# EAGLE board open-lux-F (EAGLE 6.5.0)
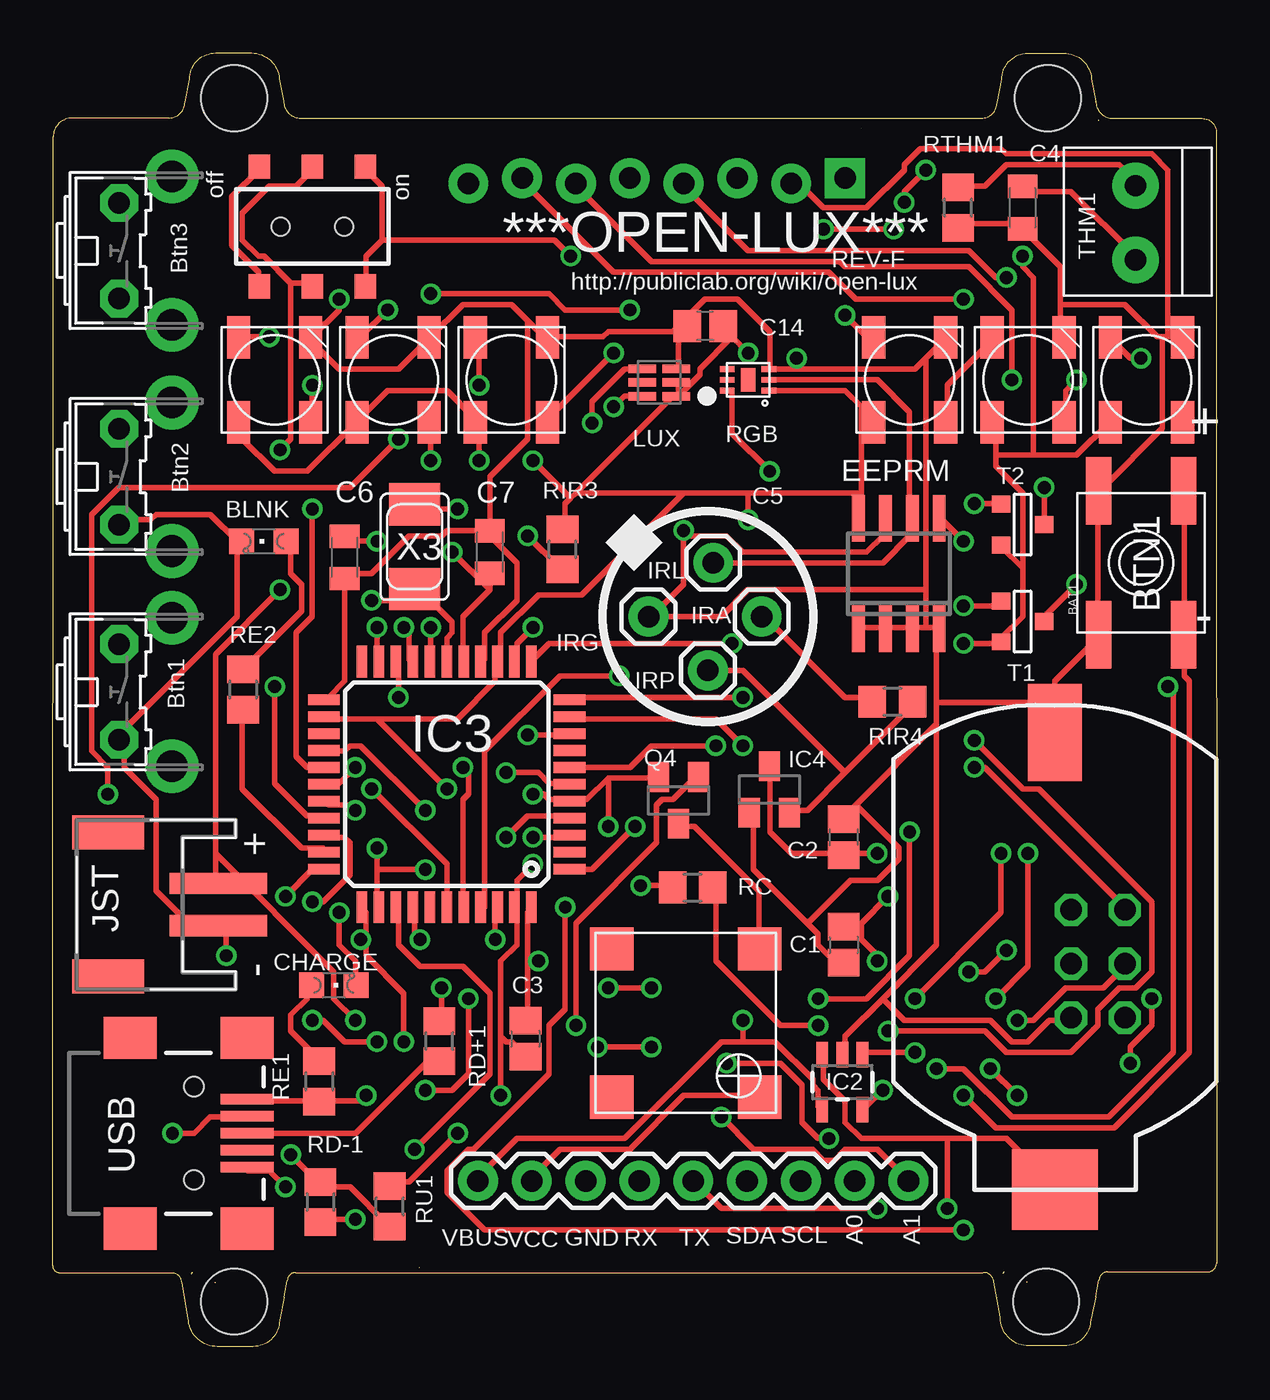
[diagram p0: board, top side]
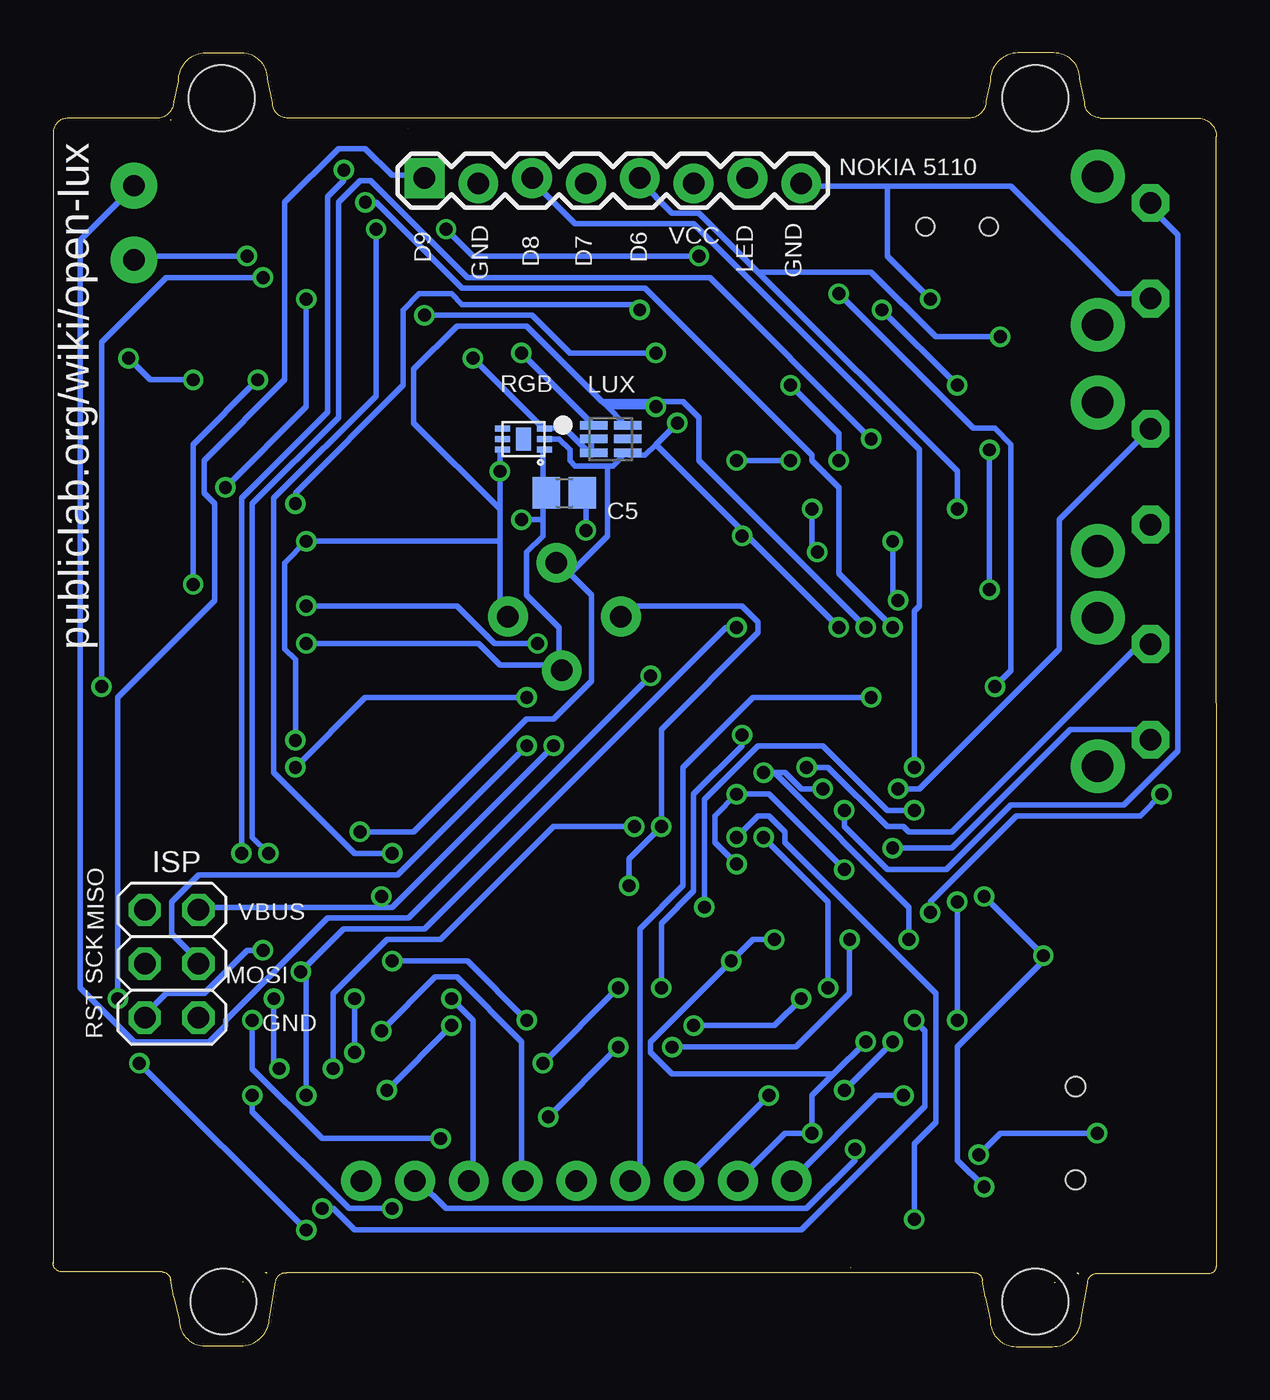
[diagram p1: board, bottom side, seen from below]

Size 54.93 x 61.06 mm. Coordinates in mm from the lower left corner, seen from the top.
Outline: 54.92,57.31 54.93,3.93
Outline: 7.63,3.03 arc-90 7.65,3.01
Outline: 17.28,3.73 arc-90 17.29,3.72
Outline: 38.17,57.5 arc-90 38.16,57.51
Outline: 49.35,57.89 arc90 49.37,57.91
Outline: 43.89,3.49 11.45,3.49 arc90 11.06,3.1
Outline: 43.84,57.98 11.7,57.98 arc-90 10.89,58.79 10.89,58.78 10.69,59.73 arc90 9.38,61.06 7.68,61.06 arc90 6.45,59.82 6.23,58.73 arc-90 5.49,57.99 0.9,57.99 arc90 0.01,57.1 0.01,56.91 0,3.82 arc90 0.36,3.46 5.59,3.46 arc-90 6.09,3.02 6.39,1.34 arc90 7.76,0 9.46,0 arc90 10.69,1.24 10.91,2.33 11.06,3.11
Outline: 43.83,57.98 arc90 44.57,58.72 44.79,59.81 arc-90 46.02,61.05 47.72,61.05 arc-90 49.03,59.72 49.23,58.77 49.23,58.78 arc90 50.04,57.97 54.26,57.97 arc-90 54.92,57.31
Outline: 6.25,2.28 6.25,2.27
Outline: 6.59,3.48 arc90 6.53,3.42
Outline: 45.95,3.06 arc-90 45.97,3.04
Outline: 44.57,2.31 44.57,2.3
Outline: 49.38,3.14 49.23,2.36 48.98,1.27 arc-90 47.75,0.03 46.08,0.03 arc-90 44.71,1.37 44.41,3.05 arc90 43.91,3.49
Outline: 49.38,3.13 arc-90 49.77,3.52 54.49,3.52 arc90 54.93,3.96
Outline: 44.91,3.51 arc90 44.85,3.45
Copper layers (1*16): Top 0.0356mm / dielectric 1.5011mm / Bottom 0.0356mm
Design rules "LaenPCBOrder": minimum track width 6mil, minimum drill 13mil, track to track 6mil, track to pad 6mil, pad to pad 6mil, via to via 6mil, smd to smd 6mil, copper to edge 15mil, drill to drill 6mil, minimum pad ring 7mil, minimum via ring 7mil, stop-mask expansion 3mil, vias tented up to drill 0mil, thermal gap 10mil
Net classes: 0 default: width 0.254 mm, clearance 0.203 mm; 1 power: width 0.254 mm, clearance 0.203 mm
Holes 3.1 mm at 8.56,58.92 46.96,58.92 8.56,2.12 46.88,2.12

## Footprints (pad centres in the part's own frame; a part is rotated, then mirrored left to right if it is on the bottom)
B3F-31XX = drill 1.016 pad 1.778 octagon: 1 -2.261,-1.245; 2 2.261,-1.245 | drill 1.499 pad 2.54: 3 -3.505,1.245; 4 3.505,1.245
BATTCOM_20MM_PTH_SMT = smd 4.572 x 2.54: P$1 0,0 | smd 3.81 x 4.064: P$2 21.59,0
CHIPLED_0805 = smd 1.2 x 1.2: A 0,-1.05; C 0,1.05
EVQ-Q2 = smd 3.2 x 1.2: A -3.4,-2; A' 3.4,-2; B -3.4,2; B' 3.4,2
C0805 = smd 1.3 x 1.5: 1 -0.85,0; 2 0.85,0
C0805K = smd 1.1 x 1.4: 1 -1,0; 2 1,0
JST-PH-2-SMT-RA = smd 1 x 4.6: 1 1,-3.7; 2 -1,-3.7 | smd 1.6 x 3.4: NC1 -3.4,1.5; NC2 3.4,1.5
SO-08 = smd 0.6 x 2.2: 1 -1.905,-2.6; 2 -0.635,-2.6; 3 0.635,-2.6; 4 1.905,-2.6; 5 1.905,2.6; 6 0.635,2.6; 7 -0.635,2.6; 8 -1.905,2.6
SOT23-5 = smd 0.55 x 1.2: 1 -0.95,-1.3; 2 0,-1.3; 3 0.95,-1.3; 4 0.95,1.3; 5 -0.95,1.3
TQFP44 = smd 1.5 x 0.5: 1 -5.8,4; 2 -5.8,3.2; 3 -5.8,2.4; 4 -5.8,1.6; 5 -5.8,0.8; 6 -5.8,0; 7 -5.8,-0.8; 8 -5.8,-1.6; 9 -5.8,-2.4; 10 -5.8,-3.2; 11 -5.8,-4; 23 5.8,-4; 24 5.8,-3.2; 25 5.8,-2.4; 26 5.8,-1.6; 27 5.8,-0.8; 28 5.8,0; 29 5.8,0.8; 30 5.8,1.6; 31 5.8,2.4; 32 5.8,3.2; 33 5.8,4 | smd 0.5 x 1.5: 12 -4,-5.8; 13 -3.2,-5.8; 14 -2.4,-5.8; 15 -1.6,-5.8; 16 -0.8,-5.8; 17 0,-5.8; 18 0.8,-5.8; 19 1.6,-5.8; 20 2.4,-5.8; 21 3.2,-5.8; 22 4,-5.8; 34 4,5.8; 35 3.2,5.8; 36 2.4,5.8; 37 1.6,5.8; 38 0.8,5.8; 39 0,5.8; 40 -0.8,5.8; 41 -1.6,5.8; 42 -2.4,5.8; 43 -3.2,5.8; 44 -4,5.8
SOT23 = smd 1 x 1.4: 1 -0.95,-1.1; 2 0.95,-1.1; 3 0,1.1
1X01 = drill 1.016 pad 1.88: 1 0,0
2X03 = drill 1.016 octagon: 1 -2.54,-1.27; 2 -2.54,1.27; 3 0,-1.27; 4 0,1.27; 5 2.54,-1.27; 6 2.54,1.27
AYZ0202 = smd 1 x 1.15: 1 -2.5,2.825; 2 0,2.825; 3 2.5,2.825; 4 -2.5,-2.825; 5 0,-2.825; 6 2.5,-2.825 | hole 0.85: 1.5,0; -1.5,0
1X09 = drill 1.016 pad 1.88: 1 0,0; 2 2.54,0; 3 5.08,0; 4 7.62,0; 5 10.16,0; 6 12.7,0; 7 15.24,0; 8 17.78,0; 9 20.32,0
TSL2561_FN@1 = smd 1.3 x 0.4: ADR -0.8,0; CLK 0.8,-0.65; DATA 0.8,0.65; INT 0.8,0; VDD -0.8,0.65; VSS -0.8,-0.65
DFN-6 = smd 0.28 x 0.7: 1 -0.5,-0.988; 2 0,-0.988; 3 0.5,-0.988; 4 0.5,0.988; 5 0,0.988; 6 -0.5,0.988 | smd 1.1 x 0.7: P$1 0,0
1X08_LOCK = drill 1.016 pad 1.88 square: 1 0,0.127 | drill 1.016 pad 1.88: 2 2.54,-0.127; 3 5.08,0.127; 4 7.62,-0.127; 5 10.16,0.127; 6 12.7,-0.127; 7 15.24,0.127; 8 17.78,-0.127
R0805 = smd 1.3 x 1.5: 1 -0.95,0; 2 0.95,0
R0805@1 = smd 1.3 x 1.5: 1 -0.95,0; 2 0.95,0
SOT-23 = smd 0.787 x 0.889: 1 0.025,-1.016; 2 -0.94,1.016; 3 0.991,1.016
1X2-3.5MM = drill 1 pad 2.184: 1 1.8,0; 2 -1.7,0
SMT-8585-BUZZER = smd 2.05 x 2.05: + -3.5,-3.5; - 3.5,-3.5; NC1 -3.5,3.5; NC2 3.5,3.5
RGBLED5050_4 = smd 2 x 1.1: D -2,1.7; I 2,1.7; O -2,-1.7; S 2,-1.7
USB-MINIB = smd 2.5 x 0.5: D+ 2.5,0; D- 2.5,0.8; GND 2.5,-1.6; ID 2.5,-0.8; VBUS 2.5,1.6 | smd 2.5 x 2: GND@1 -3,-4.5; GND@2 -3,4.5; GND@3 2.5,4.5; GND@4 2.5,-4.5 | hole 0.9: 0,2.2; 0,-2.2
NX5032 = smd 2 x 2.4: P$1 2,0; P$2 -2,0

## Placement (x,y rotation side)
B1  [B3F-31XX]  4.37,30.9 270 top
B2  [B3F-31XX]  4.37,41.06 270 top
B3  [B3F-31XX]  4.37,51.73 270 top
BAT1  LIR2032  [BATTCOM_20MM_PTH_SMT]  47.3,28.99 270 top
BLNK  0805  [CHIPLED_0805]  9.96,38.01 90 top
BTN1  [EVQ-Q2]  51.36,36.99 270 top
C1  10u  [C0805]  37.33,18.96 270 top
C2  10u  [C0805]  37.33,24.04 90 top
C3  10u  [C0805]  22.3,14.53 270 top
C4  [C0805K]  45.77,53.76 270 top
C5  0.1uF  [C0805]  30.79,40.3 0 bottom
C6  18pF  [C0805K]  13.77,37.25 270 top
C7  18pF  [C0805K]  20.63,37.5 90 top
C14  0.1uF  [C0805]  30.79,48.17 180 top
CHARGE  0805  [CHIPLED_0805]  13.26,17.05 270 top
CN1  [JST-PH-2-SMT-RA]  4.12,20.86 90 top
EEPRM  24AA128SN  [SO-08]  39.93,36.49 0 top
IC2  MCP73831  [SOT23-5]  37.26,12.48 180 top
IC3  ATMEGA32U4-AU  [TQFP44]  18.59,26.53 180 top
IC4  MCP1700-33  [SOT23]  33.82,26.29 0 top
IRA  M01PTH  [1X01]  33.45,34.45 0 top
IRG  M01PTH  [1X01]  28.12,34.45 0 top
IRL  M01PTH  [1X01]  31.17,36.99 0 top
IRP  M01PTH  [1X01]  30.91,31.91 0 top
ISP  [2X03]  49.33,18.07 270 bottom
J1  AYZ0202  [AYZ0202]  12.24,52.87 180 top
JP1  M09  [1X09]  20.06,7.82 0 top
LUXNIR  TSL2561  [TSL2561_FN@1]  28.63,45.5 180 top
LUXNIR1  TSL2561  [TSL2561_FN@1]  28.6,42.84 0 bottom
LUXRGB1  TCS34725  [DFN-6]  32.82,45.63 90 top
LUXRGB2  TCS34725  [DFN-6]  32.72,42.84 90 bottom
NKA  [1X08_LOCK]  37.39,55.03 0 bottom
Q4  BSS123  [SOT23]  29.53,25.78 180 top
RC  22K  [R0805]  30.2,21.67 0 top
RD+1  47  [R0805]  18.24,14.42 90 top
RD-1  47  [R0805]  12.62,6.82 270 top
RE1  1.5K  [R0805]  12.57,12.52 270 top
RE2  1.5K  [R0805]  8.98,31.01 270 top
RIR3  10K  [R0805]  24.05,37.63 90 top
RIR4  10K  [R0805]  39.62,30.44 0 top
RTHM1  3k  [R0805@1]  42.72,53.76 90 top
RU1  1.5K  [R0805]  15.89,6.61 90 top
T1  FDN340P  [SOT-23]  45.77,34.2 90 top
T2  FDN340P  [SOT-23]  45.77,38.77 90 top
THM1  1X2-3.5MM  [1X2-3.5MM]  51.11,53 90 top
U$1  BUZZER  [SMT-8585-BUZZER]  29.87,15.27 90 top
U$6  WS2813  [RGBLED5050_4]  10.47,45.63 90 top
U$7  WS2813  [RGBLED5050_4]  16.05,45.63 90 top
U$8  WS2813  [RGBLED5050_4]  21.64,45.63 90 top
U$9  WS2813  [RGBLED5050_4]  40.44,45.63 90 top
U$10  WS2813  [RGBLED5050_4]  46.03,45.63 90 top
U$11  WS2813  [RGBLED5050_4]  51.61,45.63 90 top
X2  USBSMD  [USB-MINIB]  6.66,10.07 0 top
X3  8MHz  [NX5032]  17.07,37.76 90 top

## Library data of the parts
B1-B3 BTN1 C5-C7 C14 CN1 IC4 THM1 U$1 U$6-U$11 = adafruit
BAT1 IC2 J1 = SparkFunNew
BLNK CHARGE = led
C1-C3 = resistor
C4 = adafruit2013
EEPRM = microchip; MF: MICROCHIP; MPN: 24AA128-I/SN; OC_FARNELL: unknown; OC_NEWARK: 92C6842
IC3 X3 = adaprog
IRA IRG IRL IRP JP1 NKA = SparkFun-Connectors
ISP = pinhead
LUXNIR LUXNIR1 = microbuilder
LUXRGB1 LUXRGB2 = dwbLibrary
Q4 = transistor-small-signal
RC RD+1 RD-1 RE1 RE2 RIR3 RIR4 RTHM1 RU1 = rcl
T1 T2 = zetex
X2 = SparkFun

## Nets
A0: IC3.36 JP1.8
A1: IC3.37 JP1.9
A2: IC3.38
A3: B2.1 IC3.39
A4: B1.1 IC3.40
A5: IC3.41 RTHM1.2 THM1.1
D4: IC3.25
D5: IC3.31 Q4.1
D6: IC3.27 NKA.5 U$6.I
D7: IC3.1 NKA.4
D8: IC3.28 NKA.3
D9: IC3.29 NKA.1
D10: IC3.30 T2.3
D11: IC3.12 T1.3
D12: B3.1 IC3.26
D13: IC3.32 RE2.2
D+: RD+1.1 X2.D+
D-: RD-1.1 RU1.1 X2.D-
GND: B1.2 B2.2 B3.2 BAT1.P$1 BLNK.C BTN1.A BTN1.A' C1.2 C2.2 C3.2 C4.2 C5.2 C6.2 C7.2 C14.2 CN1.2 EEPRM.1 EEPRM.2 EEPRM.3 EEPRM.4 EEPRM.7 IC2.2 IC3.5 IC3.15 IC3.23 IC3.33 IC3.35 IC3.43 IC4.1 IRG.1 ISP.6 JP1.3 LUXNIR1.ADR LUXNIR1.VSS LUXNIR.VSS LUXRGB1.3 LUXRGB2.3 NKA.2 NKA.8 Q4.2 RC.1 RTHM1.1 U$6.S U$7.S U$8.S U$9.S U$10.S U$11.S X2.GND
MISO: IC3.11 ISP.1
MOSI: IC3.10 ISP.4
N$1: J1.3 J1.6
N$2: C7.1 IC3.16 X3.P$1
N$3: C6.1 IC3.17 X3.P$2
N$4: NKA.7 T2.1
N$5: CHARGE.C IC2.1
N$6: IC2.5 RC.2
N$7: Q4.3 U$1.-
N$8: NKA.6 T1.1
N$10: CHARGE.A RE1.1
N$18: BLNK.A RE2.1
N$21: IC3.4 RD+1.2
N$22: IC3.3 RD-1.2
N$23: U$6.O U$7.I
N$24: U$7.O U$8.I
N$25: U$8.O U$9.I
N$26: U$9.O U$10.I
N$28: U$10.O U$11.I
RESET: BTN1.B BTN1.B' IC3.13 ISP.5
RXD: IC3.20 JP1.4
RXLED/SS: IC3.8
SCK: IC3.9 ISP.3
SCL: EEPRM.6 IC3.18 IRL.1 JP1.7 LUXNIR1.CLK LUXNIR.CLK LUXRGB1.2 LUXRGB2.2 RIR3.1
SDA: EEPRM.5 IC3.19 IRA.1 JP1.6 LUXNIR1.DATA LUXNIR.DATA LUXRGB1.6 LUXRGB2.6 RIR4.1
TXD: IC3.21 JP1.5
TXLED: IC3.22
VBAT: BAT1.P$2 CN1.1 IC2.3 J1.2 J1.5
VBUS: C1.1 IC2.4 IC3.7 ISP.2 JP1.1 RE1.2 X2.VBUS
VCC: C3.1 C4.1 C5.1 C14.1 EEPRM.8 IC3.6 IC3.14 IC3.24 IC3.34 IC3.42 IC3.44 IC4.2 IRP.1 JP1.2 LUXNIR1.VDD LUXNIR.ADR LUXNIR.VDD LUXRGB1.1 LUXRGB2.1 RIR3.2 RIR4.2 RU1.2 T1.2 T2.2 THM1.2 U$1.+ U$6.D U$7.D U$8.D U$9.D U$10.D U$11.D
VDD: C2.1 IC4.3 J1.1 J1.4

## Tracks (layer width: path | path; a pad name or v marks a point on that pad's centre or on a via)
A0  (via drill 0.61)
  Top 0.254: v17.07,9.31 20.63,12.86 20.63,16.67 19.36,17.94 17.32,17.94 16.31,18.96 16.31,20.48 IC3.36
  Bottom 0.254: v17.07,9.31 17.07,8.8 19.36,6.51 36.37,6.51 37.64,7.78 JP1.8
A1  (via drill 0.61)
  Top 0.254: v17.32,19.21 17.07,19.47 17.07,20.48 IC3.37 | v28.25,14.13 v25.71,14.13 | v31.55,10.83 33.07,9.31 35.87,9.31 36.37,8.8 36.88,8.8 37.39,9.31 38.91,9.31 40.18,8.04 JP1.9
  Bottom 0.254: v17.32,19.21 17.32,16.67 19.86,14.13 v25.71,14.13 | v31.55,10.83 v28.25,14.13
A3  (via drill 0.61)
  Top 0.254: v15.04,26.33 18.59,22.77 IC3.39
  Bottom 0.254: v15.04,26.33 14.02,26.33 7.42,32.93 7.42,39.03 B2.1
A4  (via drill 0.61)
  Top 0.254: v19.36,27.34 19.61,27.09 19.61,26.07 19.36,25.82 19.36,20.74 IC3.40
  Bottom 0.254: v19.36,27.34 18.34,27.34 15.55,24.55 14.78,24.55 14.53,24.29 12.5,24.29 3.86,32.93 3.35,32.93 B1.1
A5  (via drill 0.61)
  Top 0.254: v26.72,31.66 23.93,31.66 20.37,28.1 20.37,20.74 IC3.41 | RTHM1.2 42.72,54.77 43.99,54.77 45.01,55.79 50.34,55.79 51.11,55.03 THM1.1
  Bottom 0.254: v26.72,31.66 38.15,20.23 41.96,20.23 46.79,15.4 46.79,15.15 47.55,14.39 51.11,14.39 53.65,16.93 53.65,52.23 51.11,54.77 THM1.1
D5  (via drill 0.61)
  Top 0.254: v24.69,15.15 24.69,19.98 28.5,23.79 28.5,25.56 28.75,25.82 29.26,25.82 30.28,26.83 Q4.1 | v19.61,16.42 19.61,12.86 18.85,12.1 v17.58,12.1 | v15.29,14.39 13.77,14.39 12.75,15.4 v12.24,15.4 | v12.24,20.99 12.75,20.99 14.02,22.26 14.02,23.79 13.77,24.04 13.01,24.04 IC3.31
  Bottom 0.254: v24.69,15.15 20.88,15.15 v19.61,16.42 | v15.29,14.39 v17.58,12.1 | v12.24,20.99 v12.24,15.4
D6  (via drill 0.61)
  Top 0.254: v12.24,39.53 12.24,34.45 11.48,33.69 11.48,27.85 11.99,27.34 12.75,27.34 IC3.27 | v10.21,47.66 8.94,47.66 U$6.I
  Bottom 0.254: v12.24,39.53 12.24,41.31 21.64,50.71 | 21.64,50.71 24.44,53.5 25.71,53.5 27.23,55.03 NKA.5 | v10.21,47.66 13.26,47.66 16.31,50.71 21.64,50.71
D7  (via drill 0.61)
  Top 0.254: v27.48,24.55 25.45,22.52 24.44,22.52 IC3.1 | v41.71,13.12 42.98,13.12 45.26,10.83 49.84,10.83 52.88,13.88 52.88,30.9 v52.63,31.15 | v45.01,50.46 44.5,50.46 43.23,51.73 32.82,51.73 29.77,54.77 NKA.4
  Bottom 0.254: v27.48,24.55 31.29,24.55 36.63,19.21 39.17,19.21 41.71,16.67 v41.71,13.12 | v52.63,31.15 52.63,47.41 49.58,50.46 v45.01,50.46
D8  (via drill 0.61)
  Top 0.254: v14.28,27.34 13.51,26.58 13.01,26.58 IC3.28
  Bottom 0.254: v14.28,27.34 14.28,34.71 14.02,34.96 14.02,42.33 24.69,53 30.28,53 32.31,55.03 NKA.3
D9  (via drill 0.61)
  Top 0.254: v14.28,25.31 14.02,25.56 13.01,25.56 IC3.29 | v24.18,20.74 24.18,15.91 23.42,15.15 23.42,12.86 19.86,9.31 19.61,9.31 18.59,8.29 18.59,7.28 20.37,5.5 v42.98,5.5 | v50.85,13.37 50.85,14.13 51.87,15.15 v51.87,16.42
  Bottom 0.254: v14.28,25.31 15.55,25.31 18.59,28.36 21.64,28.36 24.18,25.82 v24.18,20.74 | v50.85,13.37 v42.98,5.5 | v51.87,16.42 51.87,30.64 47.3,35.22 47.3,39.79 47.8,40.3 47.8,41.82 43.99,45.63 43.99,54.01 41.45,56.55 40.18,56.55 38.91,55.28 37.39,55.28 NKA.1
D10  (via drill 0.61)
  Top 0.254: v43.49,39.79 44.76,39.79 T2.3 | v27.23,48.93 24.18,48.93 23.42,49.69 v17.83,49.69 | v10.47,31.15 10.47,26.58 11.99,25.06 12.75,25.06 IC3.30
  Bottom 0.254: v43.49,39.79 43.49,40.3 38.41,45.38 38.41,48.93 37.64,49.69 36.12,49.69 35.61,49.19 27.48,49.19 v27.23,48.93 | v17.83,49.69 11.48,43.34 10.47,43.34 9.7,42.58 9.7,31.91 v10.47,31.15
D11  (via drill 0.61)
  Top 0.254: v42.98,34.96 44.76,34.96 T1.3 | v32.06,33.18 23.42,33.18 22.66,32.42 IC3.12
  Bottom 0.254: v42.98,34.96 35.87,34.96 34.09,33.18 v32.06,33.18
D12  (via drill 0.61)
  Top 0.254: v17.58,25.31 14.53,28.36 14.02,28.36 13.77,28.1 13.01,28.1 IC3.26
  Bottom 0.254: v17.58,25.31 17.58,24.55 15.55,22.52 12.75,22.52 9.7,25.56 4.37,25.56 1.83,28.1 1.83,52.49 3.1,53.76 B3.1
D13
  Top 0.254: IC3.32 12.75,23.53 11.74,23.53 8.94,26.33 8.94,29.88 RE2.2
D+
  Top 0.254: X2.D+ 14.28,10.07 17.58,13.37 18.09,13.37 RD+1.1
D-  (via drill 0.61)
  Top 0.254: RU1.1 15.8,5.75 14.02,7.53 12.75,7.53 RD-1.1 12.5,7.78 v11.23,9.05 | v5.64,10.07 6.66,10.07 7.42,10.83 8.94,10.83 X2.D-
  Bottom 0.254: v5.64,10.07 10.21,10.07 v11.23,9.05
GND  (via drill 0.61)
  Top 0.254: v10.97,21.25 12.24,22.52 12.75,22.52 IC3.33 | v8.18,18.45 8.18,19.47 7.93,19.72 CN1.2 7.67,19.98 6.4,19.98 4.88,21.5 4.88,25.82 3.35,27.34 3.35,28.61 B1.2 3.1,28.87 8.69,34.45 8.69,38.01 | v10.97,7.53 10.21,8.29 9.2,8.29 X2.GND | v15.29,23.53 15.29,22.52 | 15.29,22.52 15.29,20.74 IC3.35 | 8.69,38.01 7.42,39.28 4.88,39.28 4.62,39.03 3.35,39.03 B2.2 | 8.69,38.01 BLNK.C | 21.13,14.64 21.39,14.39 21.64,14.39 22.15,13.88 C3.2 | 21.13,14.64 21.13,18.2 21.9,18.96 21.9,20.48 IC3.43 21.9,20.74 21.9,22.01 v22.66,22.77 | 21.13,14.64 v21.13,11.85 | 26.21,26.83 28.5,26.83 Q4.2 | 26.21,26.83 25.2,25.82 24.44,25.82 IC3.5 24.18,25.82 23.42,25.82 23.17,26.07 v22.66,26.07 | v27.74,21.75 29.01,21.75 RC.1 | 26.21,26.83 v26.21,24.55 | 29.77,38.26 29.77,35.98 28.25,34.45 | 29.77,38.26 31.8,38.26 32.56,37.5 38.41,37.5 39.17,38.26 39.17,39.03 EEPRM.7 | 29.77,38.26 v29.77,38.52 | v17.58,22.52 15.29,22.52 | RTHM1.1 42.72,53 45.77,53 C4.2 45.77,52.74 47.55,50.96 47.55,49.19 | 47.55,49.19 47.55,47.66 U$10.S | 52.38,47.66 52.12,47.66 50.6,49.19 47.55,49.19 | 52.38,47.66 52.63,47.66 | 52.63,47.66 53.14,47.66 U$11.S | 52.63,47.66 52.63,55.54 51.87,56.3 45.01,56.3 44.76,56.55 40.95,56.55 40.18,55.79 40.18,55.54 38.41,53.76 36.37,53.76 35.36,54.77 34.85,54.77 NKA.2 | 47.3,30.39 47.3,31.41 49.33,33.44 BTN1.A' 49.33,33.69 49.33,40.3 BTN1.A 49.58,40.55 52.38,43.34 52.38,47.66 | 47.3,30.39 BAT1.P$1 47.3,29.12 | 35.61,19.98 36.12,19.47 36.12,18.96 37.14,17.94 C1.2 | 35.61,19.98 33.07,22.52 33.07,25.06 IC4.1 | EEPRM.1 38.15,33.95 39.17,33.95 EEPRM.2 39.42,33.95 40.44,33.95 EEPRM.3 40.69,33.95 41.2,33.95
  Top 0.254: 39.17,16.42 41.71,18.96 41.71,29.37 | 39.17,16.42 37.39,14.64 37.39,13.88 IC2.2 | 41.71,30.39 41.71,33.69 EEPRM.4 | 41.71,30.39 41.71,29.37 | 41.71,29.37 37.9,25.56 | 37.9,25.56 37.39,25.06 C2.2 | 41.2,33.95 41.71,33.95 EEPRM.4 | 41.96,33.95 EEPRM.4 | 39.17,16.42 40.18,15.4 44.25,15.4 45.26,14.39 46.03,14.39 47.04,15.4 48.06,15.4 ISP.6 | 35.61,19.98 37.64,22.01 38.91,22.01 39.93,23.02 39.93,23.53 37.9,25.56 | 41.71,30.39 47.3,30.39 | 35.1,46.14 40.69,46.14 41.2,46.65 | 35.1,46.14 33.83,46.14 | 41.2,46.65 41.96,47.41 U$9.S | 35.1,46.14 v35.1,46.65 | IC3.23 13.01,30.64 13.77,31.41 C6.2 13.77,36.49 15.04,36.49 16.82,38.26 18.34,38.26 18.59,38.52 20.63,38.52 | IC3.15 20.37,32.42 20.37,33.69 21.9,35.22 21.9,36.99 20.63,38.26 C7.2 20.63,38.52 | 29.52,47.92 29.52,46.14 LUXNIR.VSS | 29.52,47.92 29.77,48.17 C14.2 29.52,47.92 | 29.52,47.92 29.26,47.92 | 29.26,47.92 26.21,47.92 25.96,47.66 23.42,47.66 U$8.S 23.17,47.66 22.4,48.42 | 22.4,48.42 21.64,49.19 19.36,49.19 17.83,47.66 U$7.S 17.58,47.41 16.31,46.14 13.51,46.14 12.24,47.41 U$6.S 12.24,47.66 13.51,48.93 v13.51,49.44 | 20.63,38.52 20.63,41.06 22.4,42.84 22.4,48.42 | 33.83,46.14 33.83,47.92 32.31,49.44 30.79,49.44 29.26,47.92 | 33.83,46.14 LUXRGB1.3 | 41.2,46.65 41.2,35.72 | 41.2,35.72 41.2,33.95 | 28.25,34.45 31.55,34.45 32.82,35.72 41.2,35.72 | 28.25,34.45 IRG.1
  Bottom 0.254: v10.97,21.25 v8.18,18.45 8.18,18.2 12.24,14.13 12.24,8.8 v10.97,7.53 | v15.29,23.53 12.5,23.53 6.91,29.12 3.61,29.12 B1.2 | v21.13,11.85 24.94,8.04 JP1.3 | v27.74,21.75 27.74,23.02 v26.21,24.55 26.21,29.12 21.64,33.69 21.64,34.2 22.4,34.96 27.48,34.96 27.99,34.45 IRG.1 | v29.77,38.52 29.77,40.3 C5.2 | v22.66,22.77 23.67,23.79 23.67,25.06 v22.66,26.07 21.13,26.07 v17.58,22.52 | 15.55,54.77 19.61,54.77 NKA.8 | 15.55,54.77 9.7,54.77 4.62,49.69 3.35,49.69 B3.2 | LUXNIR1.ADR 29.52,42.84 29.52,42.33 LUXNIR1.VSS 29.52,42.07 30.79,43.34 31.55,43.34 LUXRGB2.3 31.8,43.34 v35.1,46.65 | 15.55,54.77 15.55,51.47 v13.51,49.44
MISO  (via drill 0.61)
  Top 0.254: v32.56,30.64 24.44,30.64 IC3.11 | v43.49,27.34 43.99,27.34 50.6,20.74 ISP.1
  Bottom 0.254: v32.56,30.64 40.18,30.64 v43.49,27.34
MOSI  (via drill 0.61)
  Top 0.254: v32.56,28.36 31.29,29.63 24.44,29.63 IC3.10
  Bottom 0.254: v32.56,28.36 38.66,22.26 48.06,22.26 49.33,20.99 49.33,19.47 48.06,18.2 ISP.4
N$1
  Top 0.254: J1.3 9.7,50.2 9.7,50.71 8.43,51.98 8.43,54.27 9.7,55.54 J1.6
N$2  (via drill 0.61)
  Top 0.254: 20.63,35.72 C7.1 | 20.63,35.72 19.36,34.45 19.36,32.42 IC3.16 | v19.1,39.53 17.07,39.53 X3.P$1 | 20.63,35.72 v18.85,37.5
  Bottom 0.254: v19.1,39.53 19.1,37.76 v18.85,37.5
N$3  (via drill 0.61)
  Top 0.254: v15.29,38.01 13.77,38.01 C6.1 | v15.04,35.22 16.56,35.22 17.07,35.72 X3.P$2 17.07,35.98 18.85,34.2 18.85,33.69 18.59,33.44 18.59,32.42 IC3.17
  Bottom 0.254: v15.29,38.01 15.29,35.47 v15.04,35.22
N$4  (via drill 0.61)
  Top 0.254: v46.79,40.55 T2.1 | v42.98,49.44 37.9,49.44 36.63,50.71 26.47,50.71 22.15,55.03 NKA.7
  Bottom 0.254: v46.79,40.55 42.98,44.36 v42.98,49.44
N$5  (via drill 0.61)
  Top 0.254: v13.51,20.48 13.51,18.96 14.28,18.2 14.28,17.18 CHARGE.C | v2.59,26.07 2.59,27.34 1.83,28.1 1.83,39.28 3.1,40.55 14.02,40.55 v16.31,42.84 | v44.76,23.28 44.76,20.48 v40.69,16.42 | v40.69,13.88 38.41,13.88 IC2.1
  Bottom 0.254: v13.51,20.48 13.51,20.99 9.45,25.06 3.61,25.06 v2.59,26.07 | v16.31,42.84 23.93,50.46 35.36,50.46 39.93,55.03 40.44,55.03 41.45,54.01 41.45,43.85 45.52,39.79 45.52,24.04 v44.76,23.28 | v40.69,13.88 v40.69,16.42
N$6  (via drill 0.61)
  Top 0.254: v39.17,12.1 38.41,11.34 IC2.5 | v36.12,15.15 34.34,15.15 31.29,18.2 31.29,21.5 RC.2
  Bottom 0.254: v36.12,15.15 v39.17,12.1
N$7
  Top 0.254: Q4.3 29.77,24.55 30.28,24.55 33.33,21.5 33.33,18.96 U$1.-
N$8  (via drill 0.61)
  Top 0.254: v48.31,35.98 46.79,34.45 T1.1 | v45.26,45.63 45.26,48.93 43.23,50.96 37.39,50.96 37.14,51.22 28.25,51.22 24.69,54.77 NKA.6
  Bottom 0.254: v48.31,35.98 48.31,42.58 v45.26,45.63
N$10
  Top 0.254: CHARGE.A 11.99,16.93 11.99,16.42 11.23,15.66 11.23,14.9 12.5,13.63 RE1.1
N$18
  Top 0.254: BLNK.A 11.23,38.01 11.23,36.49 11.74,35.98 11.74,34.71 9.2,32.17 RE2.1
N$21  (via drill 0.61)
  Top 0.254: v18.34,16.93 18.34,15.4 RD+1.2 | v21.39,24.04 22.4,25.06 24.18,25.06 IC3.4
  Bottom 0.254: v18.34,16.93 18.34,20.99 v21.39,24.04
N$22  (via drill 0.61)
  Top 0.254: v14.28,6.01 12.75,6.01 RD-1.2 | v22.66,24.04 24.18,24.04 IC3.3
  Bottom 0.254: v14.28,6.01 14.28,9.56 13.26,10.58 13.26,16.67 20.37,23.79 20.37,24.29 21.13,25.06 21.64,25.06 v22.66,24.04
N$23  (via drill 0.61)
  Top 0.254: v12.24,45.38 12.24,43.85 U$6.O | v15.8,48.93 14.53,47.66 U$7.I
  Bottom 0.254: v15.8,48.93 v12.24,45.38
N$24  (via drill 0.61)
  Top 0.254: v17.83,41.82 17.83,43.6 U$7.O | v20.12,45.38 20.12,47.41 U$8.I
  Bottom 0.254: v17.83,41.82 17.83,43.09 v20.12,45.38
N$25  (via drill 0.61)
  Top 0.254: v26.47,46.9 23.42,43.85 U$8.O | v37.39,48.68 38.66,47.41 U$9.I
  Bottom 0.254: v26.47,46.9 30.53,46.9 32.31,48.68 v37.39,48.68
N$26
  Top 0.254: U$9.O 42.22,43.85 42.22,45.38 44.25,47.41 U$10.I
N$28  (via drill 0.61)
  Top 0.254: v48.31,45.63 47.8,45.12 47.8,43.85 U$10.O | v51.36,46.65 50.85,46.65 50.09,47.41 U$11.I
  Bottom 0.254: v48.31,45.63 50.34,45.63 v51.36,46.65
RESET  (via drill 0.61)
  Top 0.254: BTN1.B 53.39,40.3 53.39,33.69 BTN1.B' 53.39,33.44 53.39,31.66 53.65,31.41 53.65,13.88 50.09,10.32 44.5,10.32 v42.98,11.85 | v22.66,33.95 21.9,33.18 21.9,32.42 IC3.13 | v43.23,17.69 43.99,17.69 v45.01,18.71
  Bottom 0.254: v22.66,33.95 23.17,33.95 37.39,19.72 41.2,19.72 42.98,17.94 | v45.01,18.71 45.77,18.71 47.8,16.67 49.58,16.67 50.6,15.66 ISP.5 | 42.98,17.94 v42.98,11.85 | 42.98,17.94 v43.23,17.69
RXD  (via drill 0.61)
  Top 0.254: v16.31,30.64 16.31,32.17 IC3.20
  Bottom 0.254: v16.31,30.64 21.9,30.64 25.2,27.34 25.2,21.75 27.23,19.72 27.23,8.29 27.48,8.04 JP1.4
SCK  (via drill 0.61)
  Top 0.254: v22.4,28.87 24.18,28.87 IC3.9 | v28.25,16.93 v26.21,16.93 | v31.8,13.37 34.34,13.37 35.36,12.36 35.36,10.58 36.12,9.82 v36.63,9.82 | v45.52,15.4 46.28,15.4 47.8,16.93 49.58,16.93 50.6,17.94 ISP.3
  Bottom 0.254: v22.4,28.87 22.4,28.36 24.69,26.07 24.69,21.5 26.21,19.98 v26.21,16.93 | v31.8,13.37 v28.25,16.93 | v36.63,9.82 42.22,9.82 45.52,13.12 v45.52,15.4
SCL  (via drill 0.61)
  Top 0.254: v25.45,43.6 25.45,44.61 26.98,46.14 27.74,46.14 LUXNIR.CLK | v17.83,33.95 17.83,32.42 IC3.18 | v22.4,38.26 23.93,36.74 RIR3.1 | LUXRGB1.2 38.91,45.63 40.44,44.11 40.44,39.28 EEPRM.6 40.44,39.03 40.44,38.26 39.17,36.99 IRL.1 | v36.12,16.42 38.41,16.42 40.44,18.45 v40.44,24.29
  Bottom 0.254: LUXRGB2.2 31.04,42.84 30.53,42.33 30.53,41.82 30.28,41.57 28.75,41.57 | 28.75,41.57 28.5,41.57 27.99,42.07 LUXNIR1.CLK 27.74,42.07 26.98,42.07 26.47,42.58 | 26.47,42.58 v25.45,43.6 | 26.47,42.58 22.15,38.26 | 22.15,38.26 v17.83,33.95 | 22.15,38.26 v22.4,38.26 | v36.12,16.42 35.1,15.4 35.1,8.04 JP1.7 | v40.44,24.29 37.9,24.29 32.56,29.63 31.29,29.63 29.52,31.41 29.52,35.47 30.53,36.49 | 30.53,36.49 31.04,36.99 IRL.1 30.53,36.49 | 28.75,41.57 28.75,38.26 30.53,36.49
SDA  (via drill 0.61)
  Top 0.254: v33.83,41.31 32.06,43.09 32.06,45.12 LUXRGB1.6 | v26.47,44.36 26.98,44.87 27.74,44.87 LUXNIR.DATA | RIR4.1 38.66,30.64 37.39,30.64 33.58,34.45 IRA.1 | v16.56,33.95 16.82,33.69 16.82,32.42 IC3.19 | v42.98,38.01 41.96,39.03 EEPRM.5 | v39.42,14.9 43.99,14.9 45.01,13.88 48.06,13.88 49.33,15.15 49.33,15.91 50.34,16.93 51.11,16.93 51.87,17.69 51.87,20.99 46.53,26.33 45.77,26.33 v43.49,28.61
  Bottom 0.254: 33.83,38.01 33.83,34.71 33.58,34.45 IRA.1 | 33.83,38.01 33.83,39.53 | 33.83,39.53 v33.83,41.31 33.83,42.33 LUXRGB2.6 | 29.01,44.61 32.56,48.17 35.87,48.17 37.9,46.14 37.9,43.6 33.83,39.53 | 29.01,44.61 28.75,44.36 | 28.75,44.36 27.99,43.6 LUXNIR1.DATA | 28.75,44.36 v26.47,44.36 | v16.56,33.95 24.44,41.82 24.44,43.85 25.2,44.61 29.01,44.61 | 33.83,38.01 v42.98,38.01 43.99,36.99 43.99,32.93 43.49,32.42 v43.49,28.61 | v39.42,14.9 36.88,17.44 35.87,17.44 32.82,14.39 32.82,8.04 JP1.6
TXD  (via drill 0.61)
  Top 0.254: v15.29,33.95 15.29,32.42 IC3.21 | v40.18,54.01 40.18,54.52 v41.2,55.54 | v46.03,23.28 46.03,17.94 v44.5,16.42 | v45.52,11.85 v44.25,13.12 | v38.91,6.51 31.55,6.51 30.28,7.78 JP1.5
  Bottom 0.254: v15.29,33.95 17.83,36.49 17.83,40.55 19.1,41.82 19.1,42.07 26.98,49.95 35.61,49.95 39.68,54.01 v40.18,54.01 | v41.2,55.54 41.2,55.03 41.96,54.27 41.96,44.11 46.03,40.04 v46.03,23.28 | v44.5,16.42 44.5,13.37 v44.25,13.12 | v45.52,11.85 45.52,11.09 40.95,6.51 v38.91,6.51
VBAT  (via drill 0.61)
  Top 0.254: 42.22,9.82 45.01,9.82 47.3,7.53 BAT1.P$2 | 42.22,9.82 38.15,9.82 37.39,10.58 37.39,11.59 36.37,12.61 36.37,13.63 IC2.3 | 11.23,50.2 12.24,50.2 J1.2 | 11.23,50.2 9.96,51.47 9.7,51.47 8.94,52.23 8.94,53.5 10.21,54.77 11.48,54.77 12.24,55.54 J1.5 | 11.23,50.2 11.23,42.84 v10.72,42.33 | v10.72,35.72 7.67,32.68 7.67,23.28 | 7.67,23.28 7.67,22.01 CN1.1 | v42.22,6.51 42.22,9.82 | v14.28,15.4 13.26,16.42 13.26,17.69 7.67,23.28
  Bottom 0.254: v10.72,35.72 v10.72,42.33 | v42.22,6.51 41.71,6.51 40.69,5.5 19.61,5.5 13.77,11.34 13.77,14.9 v14.28,15.4
VBUS  (via drill 0.61)
  Top 0.254: v31.29,28.36 28.25,28.36 27.23,27.34 24.44,27.34 IC3.7 | 38.15,19.98 37.39,19.98 C1.1 | v39.42,21.25 38.15,19.98 | X2.VBUS 9.2,11.59 12.5,11.59 RE1.2 12.75,11.59 14.53,11.59 v14.78,11.85 | 32.56,14.39 31.55,14.39 26.98,9.82 21.9,9.82 20.12,8.04 JP1.1 | 32.56,14.39 34.09,14.39 35.87,12.61 35.87,12.36 36.12,12.1 36.12,11.34 IC2.4 | 38.15,19.98 38.15,19.21 38.91,18.45 v38.91,18.2 | 32.56,14.39 v32.56,15.4
  Bottom 0.254: v31.29,28.36 38.91,20.74 39.42,20.74 | 39.42,20.74 48.06,20.74 ISP.2 | 39.42,20.74 v39.42,21.25 | v14.78,11.85 16.05,11.85 19.86,8.04 JP1.1 | v38.91,18.2 35.36,18.2 v32.56,15.4
VCC  (via drill 0.61)
  Top 0.254: 22.4,18.2 22.4,20.48 IC3.44 | 22.4,18.2 22.4,15.4 C3.1 | v19.1,10.07 16.82,7.78 16.05,7.78 RU1.2 | 14.78,19.21 14.78,18.45 16.56,16.67 v16.56,14.39 | 14.78,19.21 14.78,20.48 IC3.34 | v20.88,19.21 20.88,20.48 IC3.42 | U$1.+ 33.33,11.85 29.77,11.85 27.23,9.31 23.93,9.31 22.66,8.04 JP1.2 | v22.91,18.2 22.4,18.2 | C4.1 45.77,54.52 48.06,54.52 51.11,51.47 THM1.2 | 45.77,36.74 45.77,34.45 44.76,33.44 T1.2 44.76,33.18 v42.98,33.18 | 45.77,36.74 44.76,37.76 T2.2 | 44.5,42.07 44.5,41.57 45.77,40.3 45.77,36.74 | 44.5,42.07 44.5,43.6 U$10.D | 44.5,42.07 46.28,42.07 | 46.28,42.07 48.31,42.07 49.84,43.6 U$11.D | v45.77,51.47 45.77,50.96 46.28,50.46 46.28,42.07 | 37.39,27.09 40.69,30.39 RIR4.2 | 37.39,27.09 35.61,25.31 34.85,25.31 IC4.2 | 37.39,27.09 32.56,31.91 IRP.1 | 15.29,29.63 19.1,29.63 20.88,31.41 20.88,32.17 IC3.14 21.13,32.42 21.13,33.69 22.91,35.47 24.94,35.47 29.77,40.3 | 15.29,29.63 13.01,29.63 IC3.24 | v21.39,27.09 22.91,27.09 23.42,26.58 24.18,26.58 IC3.6 | 15.29,29.63 v18.59,26.33 | U$6.D 8.94,43.6 8.94,42.84 10.47,41.31 11.99,41.31 14.28,43.6 U$7.D 14.53,43.85 15.8,45.12 18.59,45.12 19.86,43.85 U$8.D 20.12,43.6 v20.12,41.82 | 38.15,44.36 38.66,43.85 U$9.D | 38.15,44.36 37.39,45.12 33.83,45.12 LUXRGB1.1 | 38.15,44.36 38.15,40.3 | 38.15,40.3 38.15,39.28 EEPRM.8 | 32.06,47.66 31.55,48.17 C14.1 32.06,47.66 | 32.06,47.66 v32.82,46.9 | 29.52,44.87 29.52,45.38 LUXNIR.ADR | 24.69,40.3 29.26,44.87 LUXNIR.VDD 29.52,44.87 | 24.69,40.3 24.44,40.04 | 24.44,40.04 24.18,39.79 24.18,38.77 RIR3.2 | 32.06,47.66 30.53,46.14 30.53,45.88 29.52,44.87 | 24.69,40.3 29.77,40.3 | 29.77,40.3 32.82,40.3 | 32.82,40.3 38.15,40.3
  Top 0.254: 24.44,40.04 v22.66,41.82 | 32.82,40.3 v32.82,39.03 | v14.53,19.21 14.78,19.21
  Bottom 0.254: JP1.2 22.4,8.04 20.37,10.07 v19.1,10.07 19.1,11.85 18.09,12.86 | 18.09,12.86 v16.56,14.39 | v20.88,19.21 21.9,19.21 v22.91,18.2 26.72,14.39 26.72,13.88 25.71,12.86 18.09,12.86 | v45.77,51.47 51.11,51.47 THM1.2 | 31.8,40.3 31.8,42.33 LUXRGB2.1 | 31.8,39.03 31.8,38.26 32.56,37.5 32.56,35.47 31.04,33.95 31.04,32.17 | 31.8,39.03 31.8,40.3 | 31.04,32.17 31.04,31.91 IRP.1 31.04,32.17 | 31.8,40.3 C5.1 | 20.88,27.09 20.37,27.09 19.61,26.33 v18.59,26.33 | 20.88,27.09 v21.39,27.09 | v32.82,46.9 29.52,43.6 LUXNIR1.VDD | v22.66,41.82 v20.12,41.82 | v32.82,39.03 31.8,39.03 | v42.98,33.18 34.85,33.18 33.83,32.17 31.04,32.17 | v14.53,19.21 14.53,20.74 20.88,27.09
VDD  (via drill 0.61)
  Top 0.254: 15.55,52.23 14.78,51.47 14.78,50.2 J1.1 | 15.55,52.23 15.55,54.77 14.78,55.54 J1.4 | IC4.3 33.83,27.34 33.83,24.29 34.85,23.28 37.14,23.28 C2.1 37.39,23.28 v38.91,23.28 | 15.55,52.23 23.67,52.23 v24.44,51.47 | v39.68,52.74 v36.37,52.74
  Bottom 0.254: v24.44,51.47 35.1,51.47 v36.37,52.74 | v39.68,52.74 39.68,44.87 44.5,40.04 44.5,27.09 40.69,23.28 v38.91,23.28

## Text on the board
tPlace: off | on | ***OPEN-LUX*** | Btn3 | REV-F | http://publiclab.org/wiki/open-lux | LUX | Btn2 | RGB | + | C5 | - | Btn1 | JST | USB | VCC | SCL | VBUS | GND | RX | TX | SDA | A0 | A1
bPlace: publiclab.org/wiki/open-lux | NOKIA 5110 | GND | LED | VCC | D6 | D7 | D8 | GND | D9 | LUX | RGB | VBUS | MISO | MOSI | SCK | GND | RST